# Altium PCB RFM232_V01.PcbDoc
Units mm, origin at the board's own origin, x right, y up, seen from the top; angles counter-clockwise.
Board outline 55.25 x 18.25 mm, 2 copper layers (Top Layer, Bottom Layer); 16 components, 20 nets, 72 pads, 19 vias.
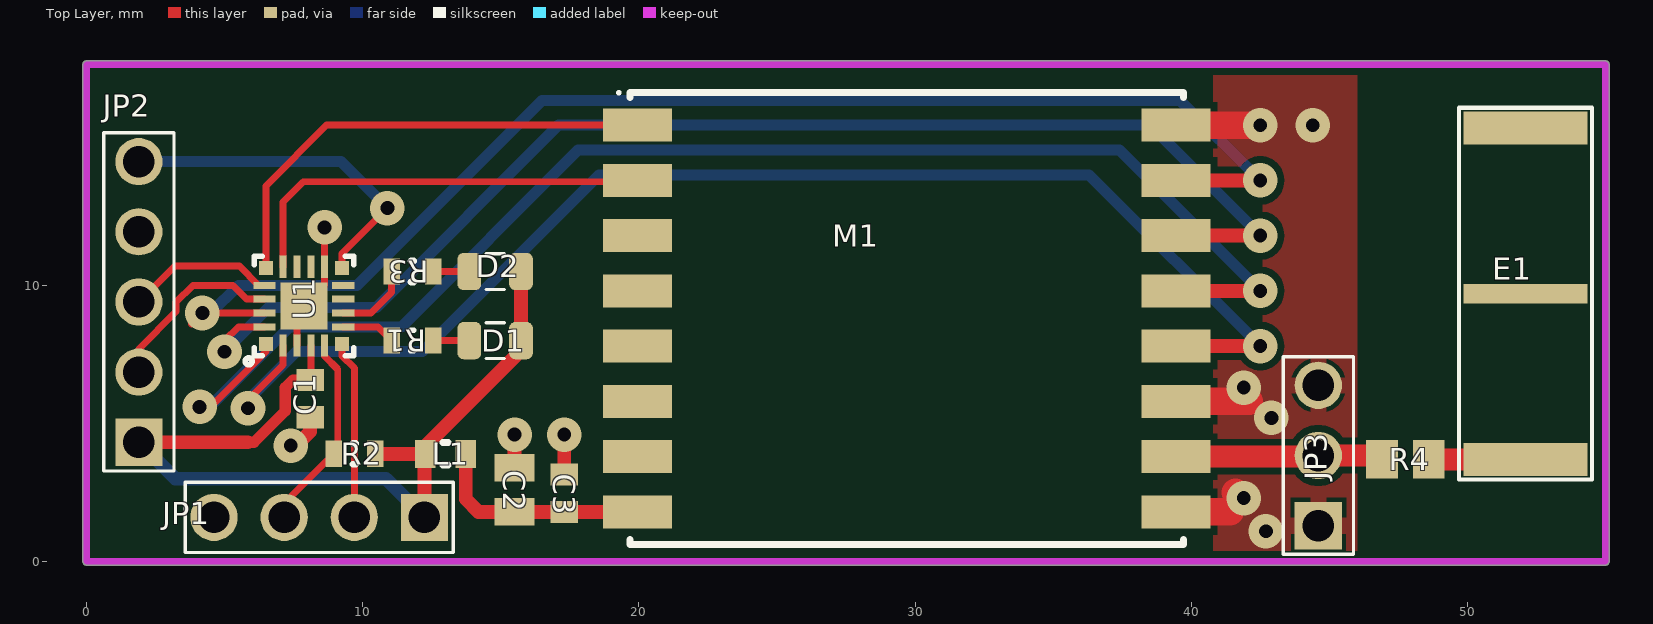
[diagram p0: Top Layer view]
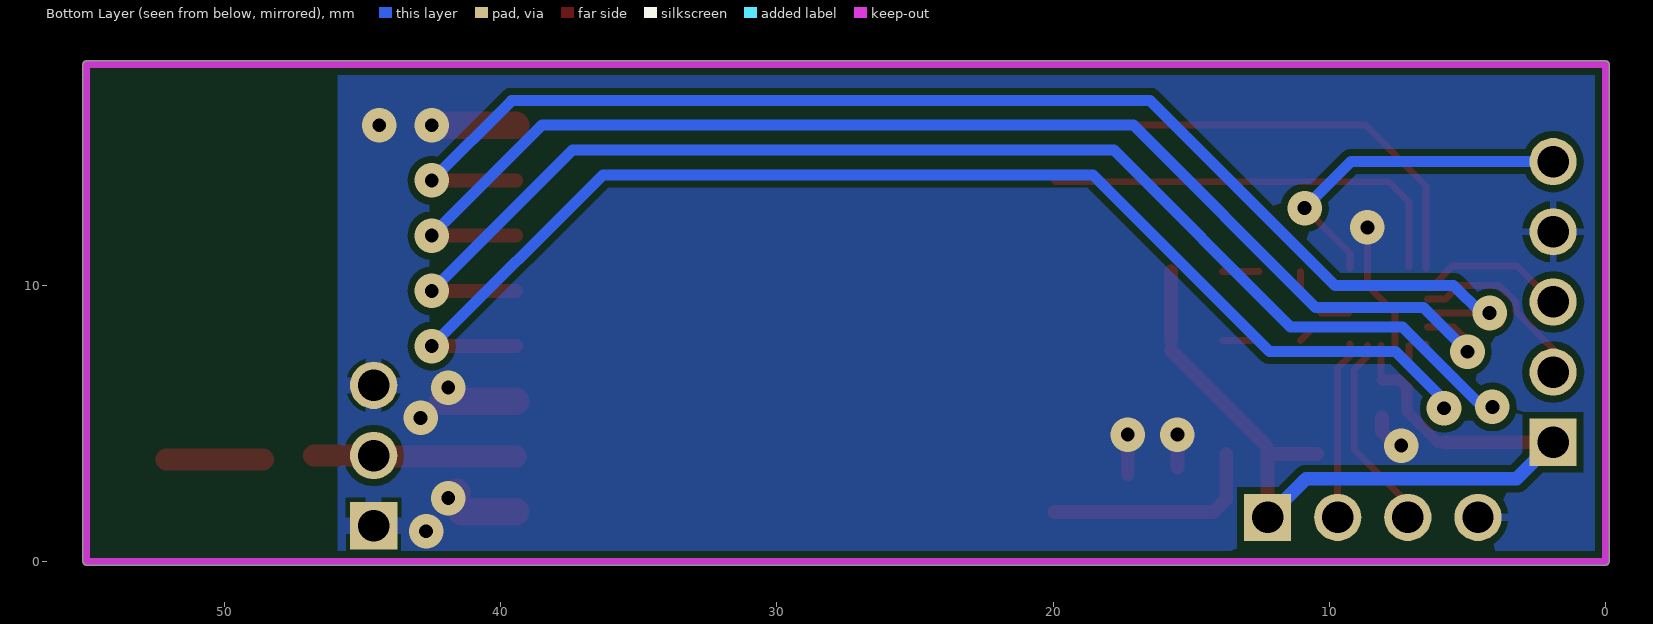
[diagram p1: Bottom Layer view, seen from below]

## Layer stack, top to bottom
Top Solder: solder mask 0.0102, Solder Resist, Dk 3.5
Top Layer: signal copper 0.0356
Dielectric 1: dielectric 0.32, FR-4, Dk 4.8
Bottom Layer: signal copper 0.0356
Bottom Solder: solder mask 0.0102, Solder Resist, Dk 3.5

## Board outline
0,-0.125 cw(c0,0) -0.125,0 -0.125,18 cw(c0,18) 0,18.125 55,18.125 cw(c55,18) 55.125,18 55.125,0 cw(c55,0) 55,-0.125

## Design rules (kind name [scope] priority, off if disabled: settings)
Clearance Clearance_4 [InNamedPolygon('JP21B') vs InNet('NetJP3_2')] p1: gap=0.25 ignorepadtopadclearanceinfootprint=FALSE
Clearance Clearance_3 [InNamedPolygon('JP21B')] p2: gap=0.254 ignorepadtopadclearanceinfootprint=FALSE except(0: Arc-Hole Track-Hole SMDPad-Hole THPad-Hole Via-Hole Fill-Hole Poly-Hole Region-Hole Text-Hole)
Clearance Clearance_2 [All vs InComponent('U1')] p3: gap=0.15 ignorepadtopadclearanceinfootprint=FALSE
Clearance Clearance_1 [InNamedPolygon('GND-T1') Or  InNamedPolygon('GND-B1')] p4: gap=0.25 ignorepadtopadclearanceinfootprint=FALSE
Clearance [All] p5: gap=0.2 ignorepadtopadclearanceinfootprint=FALSE
MinimumSolderMaskSliver [All] p1: minsoldermaskwidth=0.02
PolygonConnect PolygonConnect_1 [InComponent('JP3') vs IsNamedPolygon('JP21B') Or  IsNamedPolygon('JP21B')] p1: connectstyle=Relief reliefconductorwidth=0.6 reliefentries=4 polygonreliefangle="90 Angle" airgapwidth=0.15
PolygonConnect PolygonConnect_4 [IsVia vs IsNamedPolygon('JP21B')] p2: connectstyle=Direct reliefconductorwidth=0.254 reliefentries=4 polygonreliefangle="90 Angle" airgapwidth=0.254
PolygonConnect [All] p3: connectstyle=Relief reliefconductorwidth=0.254 reliefentries=4 polygonreliefangle="90 Angle" airgapwidth=0.254
RoutingVias [All] p1: holewidth=0.4 width=0.8 viastyle="Through Hole" minholewidth=0.711 minwidth=1.27 maxholewidth=0.711 maxwidth=1.27
SilkToSilkClearance [All] p1: silktosilkclearance=0.02
SilkToSolderMaskClearance [IsPad] p1: minsilkscreentomaskgap=0 clearancetoexposedcopper=TRUE
SolderMaskExpansion [All] p1: expansion=0.102
Width [All] p1: maxlimit=2 minlimit=0.2 preferedwidth=0.2
27 further rules are at their usual default settings.

## Components (designator, comment, footprint, x,y, rotation, side; value= is the part's Value field where it differs from the comment)
C1 "100n" CAPC1608X08N 8.1,5.9 r270 top
C2 "4u7" CAPC2012X11N 15.5,2.6 r90 top
C3 "100n" CAPC1608X08N 17.3,2.475 r90 top
D1 "GREEN" LEDC200X125X80L40N 14.8,8 r0 top
D2 "GREEN" LEDC200X125X80L40N 14.8,10.5 r0 top
E1 "C812D5" C812D5 52.1,9.7 r90 top
JP1 "nc" HDRV4W70P254_4X1_889X254H754 12.24,1.6 r180 top
JP2 "Header 5" HDRV5W70P254_5X1_1143X254H754 1.9,4.32 r90 top
JP3 "Header 3" HDRV3W70P254_3X1_635X254H754 44.6,1.3 r90 top
L1 "BLM18AG601" INDC1608X10N 13,3.9 r0 top
M1 "RFM69HW" LGA16_RFM69 29.7,8.8 r0 top
R1 "1k" RESC1608X06N 11.8,8 r180 top
R2 "4k7" RESC1608X06N 9.7,3.9 r0 top
R3 "1k" RESC1608X06N 11.8,10.5 r180 top
R4 "0" RESC2012X07N 47.75,3.7 r0 top
U1 "C8051F990-GM" QFN50P300X300X60_HS-21N 7.875,9.25 r90 top

## Footprints (in the part's own frame and the unit in brackets; to place one, negate y for a bottom-side part, rotate by r counter-clockwise, add the part's x,y. Pads: shape width x height; smd on the part's side, far side on the other; paste and mask are expansions set on the pad)
C812D5 [mm]
  rect 1.2x4.5 smd: 1(-6,0) 2(6,0)
  rect 0.7x4.5 smd: 3(0,0)
  silkscreen extent -6.73,-2.41 6.73,2.41, body extent -6.73,-2.41 6.73,2.41, height 1.8
CAPC1608X08N [mm] "Chip Capacitor, 2-Leads, Body 1,60x0,80mm, IPC Medium Density"
  rect 0.8x1 smd: 1(-0.675,0) 2(0.675,0)
  body extent -0.87,-0.48 0.87,0.47, height 0.85
CAPC2012X11N [mm] "Chip Capacitor, 2-Leads, Body 2,00x1,25mm, IPC Medium Density"
  rect 1x1.45 smd: 1(-0.8,0) 2(0.8,0)
  body extent -1.1,-0.72 1.1,0.72, height 1.1
HDRV3W70P254_3X1_635X254H754 [mm] "Header, Vertical, 2.54 mm pitch; 0.70 mm lead width, 3 pins, 1 row, 3 pins per row, 6.35 mm L X 2.54 mm W X 7.54 mm H body"
  rect 1.71x1.71 hole 1.14 paste-1.71: 1(0,0)
  round 1.71 hole 1.14 paste-1.71: 2(2.54,0) 3(5.08,0)
  silkscreen extent -1.04,-1.27 6.12,1.27, body extent -0.64,-1.27 5.71,1.27, height 7.54
HDRV4W70P254_4X1_889X254H754 [mm] "Header, Vertical, 2.54 mm pitch; 0.70 mm lead width, 4 pins, 1 row, 4 pins per row, 8.89 mm L X 2.54 mm W X 7.54 mm H body"
  rect 1.71x1.71 hole 1.14 paste-1.71: 1(0,0)
  round 1.71 hole 1.14 paste-1.71: 2(2.54,0) 3(5.08,0) 4(7.62,0)
  silkscreen extent -1.04,-1.27 8.66,1.27, body extent -0.64,-1.27 8.25,1.27, height 7.54
HDRV5W70P254_5X1_1143X254H754 [mm] "Header, Vertical, 2.54 mm pitch; 0.70 mm lead width, 5 pins, 1 row, 5 pins per row, 11.43 mm L X 2.54 mm W X 7.54 mm H body"
  rect 1.71x1.71 hole 1.14 paste-1.71: 1(0,0)
  round 1.71 hole 1.14 paste-1.71: 2(2.54,0) 3(5.08,0) 4(7.62,0) 5(10.16,0)
  silkscreen extent -1.04,-1.27 11.2,1.27, body extent -0.64,-1.27 10.79,1.27, height 7.54
INDC1608X10N [mm] "Chip Inductor, 2-Leads, Body 1,60x0,80mm, IPC Medium Density"
  rect 0.74x1.02 smd: 1(-0.735,0) 2(0.735,0)
  silkscreen extent -0.1,-0.41 0.1,0.41, body extent -0.9,-0.5 0.9,0.5, height 1
LEDC200X125X80L40N [mm] "LED, Chip; 2.00 mm L X 1.25 mm W X 0.80 mm H body"
  rrect51% 0.86x1.35 smd: A(0.935,0) K(-0.935,0)
  silkscreen extent -0.33,-0.65 0.33,0.65, body extent -1,-0.63 1,0.63, height 0.25
LGA16_RFM69 [mm] "LGA, 16-Leads, RFM69HW"
  rect 2.5x1.2 smd: 1(-9.75,7) 2(-9.75,5) 3(-9.75,3) 4(-9.75,1) 5(-9.75,-1) 6(-9.75,-3) 7(-9.75,-5) 8(-9.75,-7) 9(9.75,-7) 10(9.75,-5) 11(9.75,-3) 12(9.75,-1) 13(9.75,1) 14(9.75,3) 15(9.75,5) 16(9.75,7)
  silkscreen extent -10.47,-8.17 10.02,8.22, body extent -9.87,-8.03 9.87,8.03, height 2
QFN50P300X300X60_HS-21N [mm] "QFN, 20-Leads, Body 3,00x3,00mm, Pitch 0,50mm, Thermal Pad 1,70x1,70mm, IPC Medium Density"
  rect 0.5x0.5 smd: 1(-1.375,1.375) 6(-1.375,-1.375) 11(1.375,-1.375) 16(1.375,1.375)
  rect 0.8x0.25 smd: 2(-1.425,0.75) 3(-1.425,0.25) 4(-1.425,-0.25) 5(-1.425,-0.75) 12(1.425,-0.75) 13(1.425,-0.25) 14(1.425,0.25) 15(1.425,0.75)
  rect 0.25x0.8 smd: 7(-0.75,-1.425) 8(-0.25,-1.425) 9(0.25,-1.425) 10(0.75,-1.425) 17(0.75,1.425) 18(0.25,1.425) 19(-0.25,1.425) 20(-0.75,1.425)
  rect 1.7x1.7 smd: 21(0,0)
  silkscreen extent -2.12,-1.8 1.8,2.12, body extent -1.53,-1.53 1.53,1.53, height 0.6
RESC1608X06N [mm] "Chip Resistor, 2-Leads, Body 1,60x0,82mm, IPC Medium Density"
  rect 0.6x0.95 smd: 1(-0.75,0) 2(0.75,0)
  silkscreen extent -0.05,-0.38 0.05,0.38, body extent -0.85,-0.48 0.85,0.48, height 0.6
RESC2012X07N [mm] "Chip Resistor, 2-Leads, Body 2,00x1,25mm, IPC Medium Density"
  rect 1.15x1.4 smd: 1(-0.85,0) 2(0.85,0)
  body extent -1.08,-0.7 1.07,0.7, height 0.65

## Part data
C1 C2 C3: library part CAPN
D1 D2: library part DLED
JP1: library part "HEADER 4", "4 Pin Header 2,0 mm, 1x04", Part Field 1=CviLux
JP2: "Header, 5-Pin", LatestRevisionDate=17-Jul-2002, LatestRevisionNote="Re-released for DXP Platform.", Publisher="Altium Limited"
JP3: "Header, 3-Pin", LatestRevisionDate=17-Jul-2002, LatestRevisionNote="Re-released for DXP Platform.", Publisher="Altium Limited"
L1: library part SUPRESOR
M1: library part RFM69HW_V13_2
R1 R2 R3 R4: library part RES
U1: library part C8051F990

## Via types
v1: diameter 1.25, hole 0.5, Top Layer to Bottom Layer, 19 vias

## Nets (pads, with @x,y where several pads share a name; then routed paths per layer and width w, separated by ;. In a path a pad name is that pad's centre, name@x,y a point inside that pad or via, vN(x,y) a via of type N, cw(c..) or ccw(c..) an arc to the next point about the centre after c; other vN are vias at no path point)
GND: C1.2 C2.2 C3.2 JP1.4 JP2.4 JP3.1 JP3.3 M1.9 M1.11 M1.16 U1.3 U1.12 U1.21 | length 17.5
  Top Layer w0.25: U1.3 7.625,9 U1.21 8.625,10 U1.12 v1(8.625,12.1)
  Top Layer w0.5: v1(7.4,4.2) 7.5,4.1 8.1,4.7 C1.2 ; C2.2 v1(15.5,4.6) ; C3.2 v1(17.3,4.6)
  Top Layer w1: M1.9 41.4,1.8 ; M1.11 42.1,5.8 41.9,6 v1(41.9,6.3) ; M1.16 v1(42.5,15.8) ; v1@41.6,2.5 41.8,2.3 v1(41.9,2.3)
  other v1: 42.7,1.1 42.9,5.2 44.4,15.8
IRQ: M1.2 U1.15 | length 15.5
  Top Layer w0.25: U1.15 7.125,13.025 7.85,13.75 19.9,13.75 M1.2
MISO: M1.13 U1.1 | length 50.9
  Top Layer w0.25: v1(4.1,5.6) 4.5,5.6 6.5,7.6 U1.1
  Top Layer w0.5: M1.13 v1(42.5,9.8)
  Bottom Layer w0.4: v1(4.1,5.6) 4.451,5.6 7.351,8.5 11.4,8.5 17.8,14.9 37.4,14.9 v1(42.5,9.8)
MOSI: M1.14 U1.20 | length 47.7
  Top Layer w0.25: v1(5,7.6) 5,8 5.5,8.5 U1.20
  Top Layer w0.5: M1.14 v1(42.5,11.8)
  Bottom Layer w0.4: v1(5,7.6) 6.6,9.2 10.5,9.2 17.1,15.8 38.5,15.8 v1(42.5,11.8)
NetC2_1: C2.1 C3.1 L1.2 M1.8 | length 8
  Top Layer w0.5: L1.2 13.735,2.265 14.2,1.8 C2.1 M1.8
NetD1_K: D1.K R1.1 | length 1.3
  Top Layer w0.25: R1.1 D1.K
NetD2_K: D2.K R3.1 | length 1.3
  Top Layer w0.25: R3.1 D2.K
NetE1_1: E1.1 R4.2 | length 3.5
  Top Layer w0.8: R4.2 E1.1
NetJP1_2: JP1.2 U1.6 | length 6.5
  Top Layer w0.25: U1.6 9.25,7.45 9.7,7 JP1.2
NetJP1_3: JP1.3 R2.1 U1.5 | length 7.2
  Top Layer w0.25: JP1.3 7.16,2.11 R2.1 9.1,4.05 9.1,6.964 8.625,7.439 U1.5
NetJP3_2: JP3.2 M1.10 R4.1 | length 7.5
  Top Layer w0.25: JP3.2@44.56,3.8 JP3.2 ; R4.1@46.76,3.84 R4.1
  Top Layer w0.8: M1.10 JP3.2@44.56,3.8 ; JP3.2 R4.1@46.76,3.84
NetR1_2: R1.2 U1.7 | length 2
  Top Layer w0.25: U1.7 10.55,8.5 R1.2
NetR3_2: R3.2 U1.8 | length 2.8
  Top Layer w0.25: U1.8 10.3,9 11.05,9.75 R3.2
NSS: M1.15 U1.19 | length 48.6
  Top Layer w0.25: v1@3.8,8.6 v1(4.2,9) U1.19
  Top Layer w0.5: M1.15 v1(42.5,13.8)
  Bottom Layer w0.4: v1(4.2,9) 4.5,9 5.5,10 9.8,10 16.5,16.7 39.6,16.7 v1(42.5,13.8)
PRG: JP2.5 U1.11 | length 12.6
  Top Layer w0.25: U1.11 9.25,11.15 v1(10.9,12.8)
  Bottom Layer w0.4: JP2.5 9.22,14.48 v1(10.9,12.8)
RFRST: M1.1 U1.16 | length 17.3
  Top Layer w0.25: U1.16 6.5,13.6 8.7,15.8 M1.1
RXD: JP2.3 U1.17 | length 5.4
  Top Layer w0.25: JP2.3 3.2,10.7 5.536,10.7 6.236,10 U1.17
SCK: M1.12 U1.2 | length 48.7
  Top Layer w0.25: v1(5.85,5.55) 5.85,5.85 7.125,7.125 U1.2
  Top Layer w0.5: M1.12 v1(42.5,7.8)
  Bottom Layer w0.4: v1(5.85,5.55) 5.85,5.85 7.6,7.6 12.166,7.6 18.566,14 36.3,14 v1(42.5,7.8)
TXD: JP2.2 U1.18 | length 6.8
  Top Layer w0.25: JP2.2 1.9,7.7 3.25,9.05 3.25,9.394 3.856,10 5.3,10 5.8,9.5 U1.18
VCC: C1.1 D1.A D2.A JP1.1 JP2.1 L1.1 R2.2 U1.4 | length 32.5
  Top Layer w0.25: C1.1 8.125,6.6 U1.4 ; L1.1@12.24,3.875 L1.1 L1.1@12.265,4.165 ; D1.A@15.735,7.635 D1.A
  Top Layer w0.4: 5.845,4.32 6.07,4.32 7.2,5.45 7.2,6.3 7.475,6.575 C1.1
  Top Layer w0.5: JP2.1 5.845,4.32 ; R2.2 L1.1 ; JP1.1 L1.1@12.24,3.875 ; L1.1@12.265,4.165 D1.A@15.735,7.635 ; D1.A D2.A
  Bottom Layer w0.5: JP2.1 3.22,3 10.84,3 JP1.1
pads on no net: E1.2 E1.3 M1.3 M1.4 M1.5 M1.6 M1.7 U1.9 U1.10 U1.13 U1.14

## Polygon pours and split planes (outlines as drawn)
GND on Top Layer "JP21B" (solid, remove dead copper, pour order 10): 45.9,0 46,0.1 46,18 40.8,18 40.8,0
GND on Bottom Layer "JP21B" (solid, remove dead copper, pour order 8): 0.3,-0.1 45.9,-0.1 45.9,18 0,18

## Keep-outs
Keep-Out Layer:
  lines w0.25: 0,0 0,18 55,18 55,0 0,0

## Dimensions
0,0 to 0,18 on Mechanical 1
0,0 to 55,0 on Mechanical 1